# Altium PCB HX-SMJ-01.pcbdoc
Units mm, origin at the board's own origin, x right, y up, seen from the top; angles counter-clockwise.
Board outline 145.65 x 155.4 mm, 2 copper layers (Top Layer, Bottom Layer); 7 components, 10 nets, 43 pads, 0 vias.
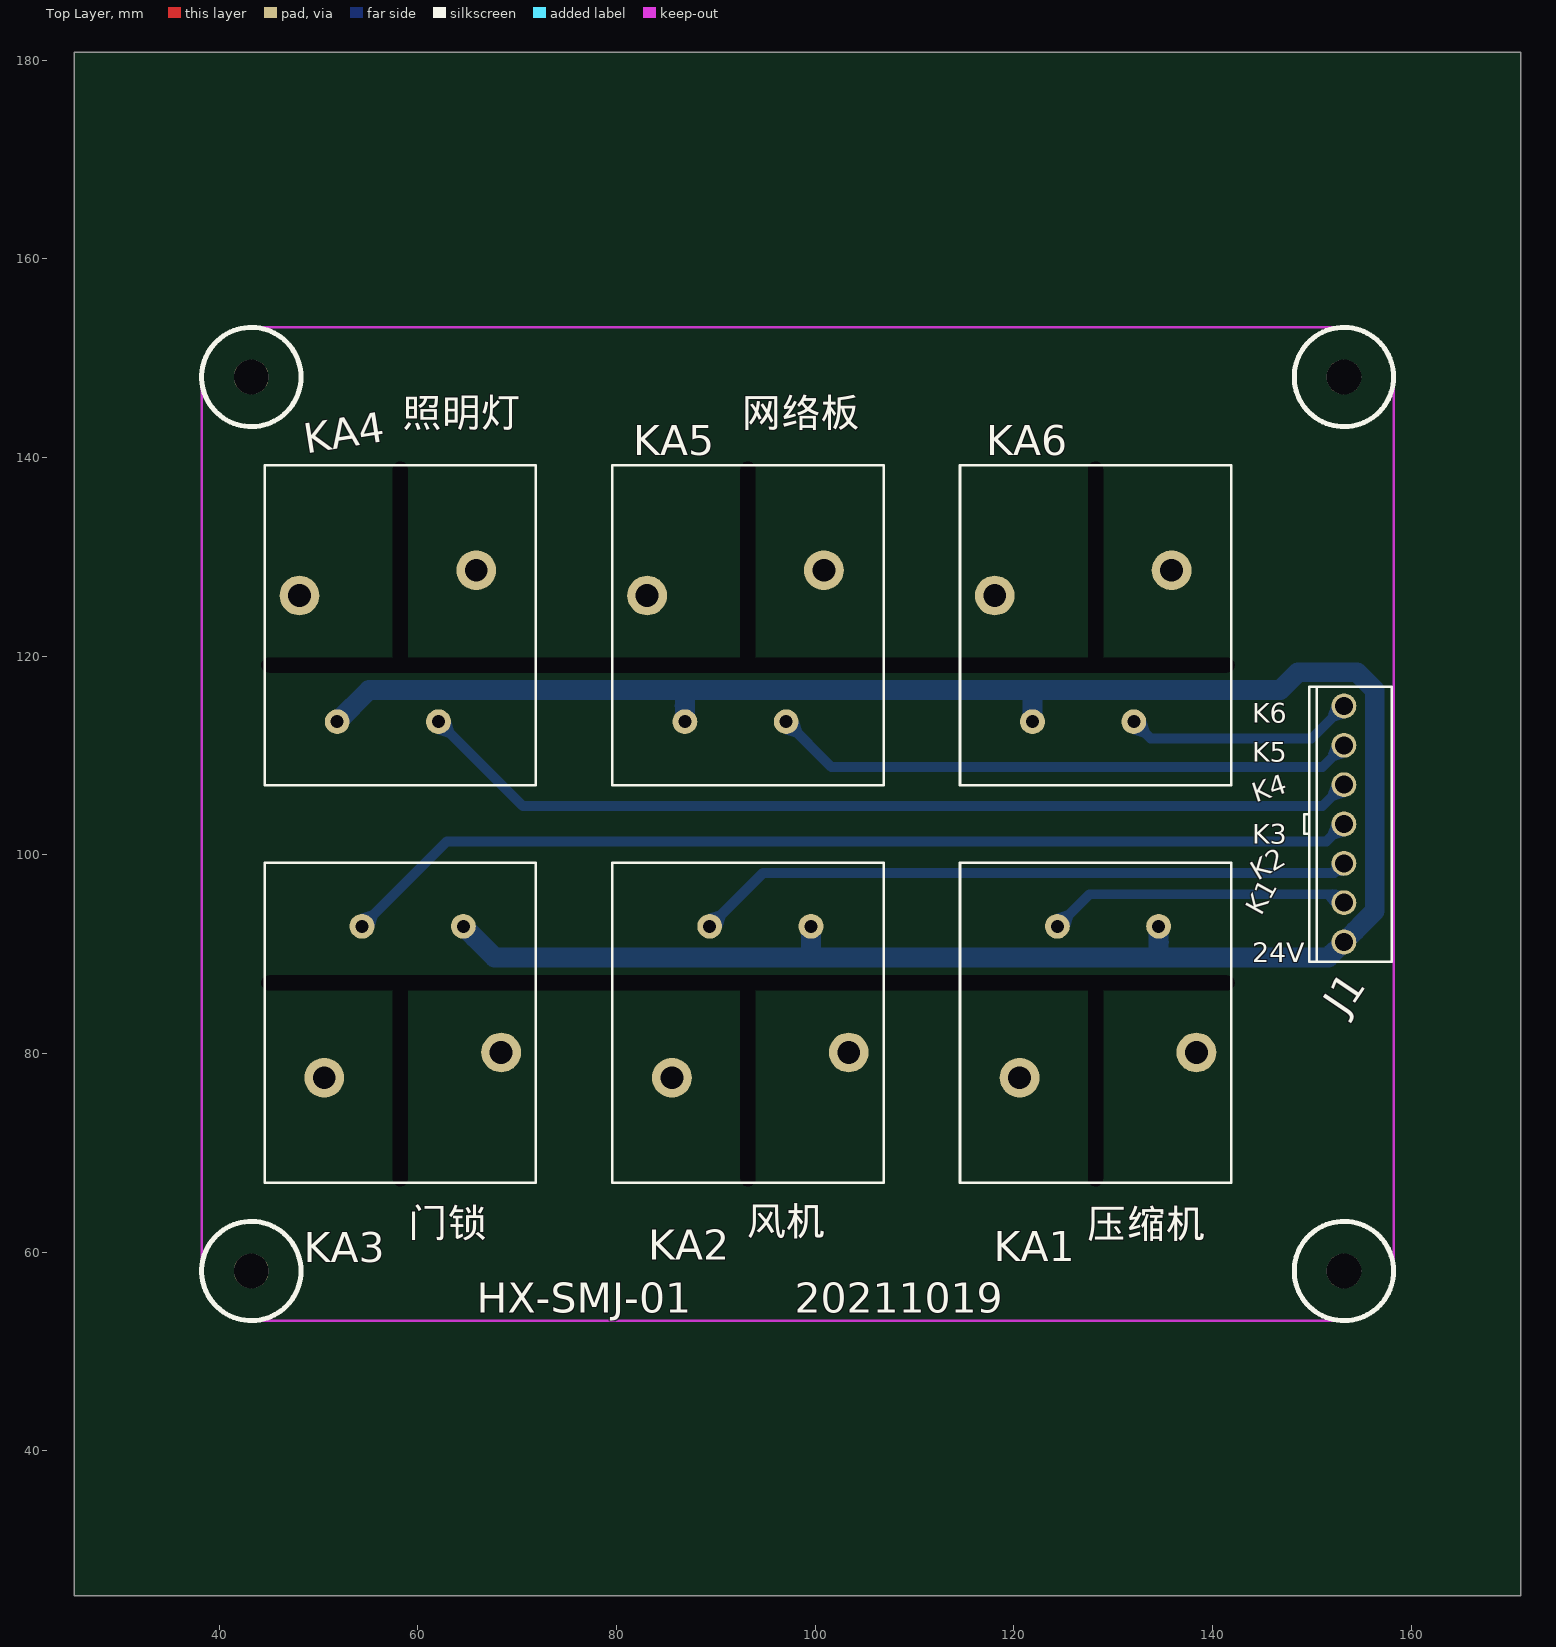
[diagram p0: Top Layer view]
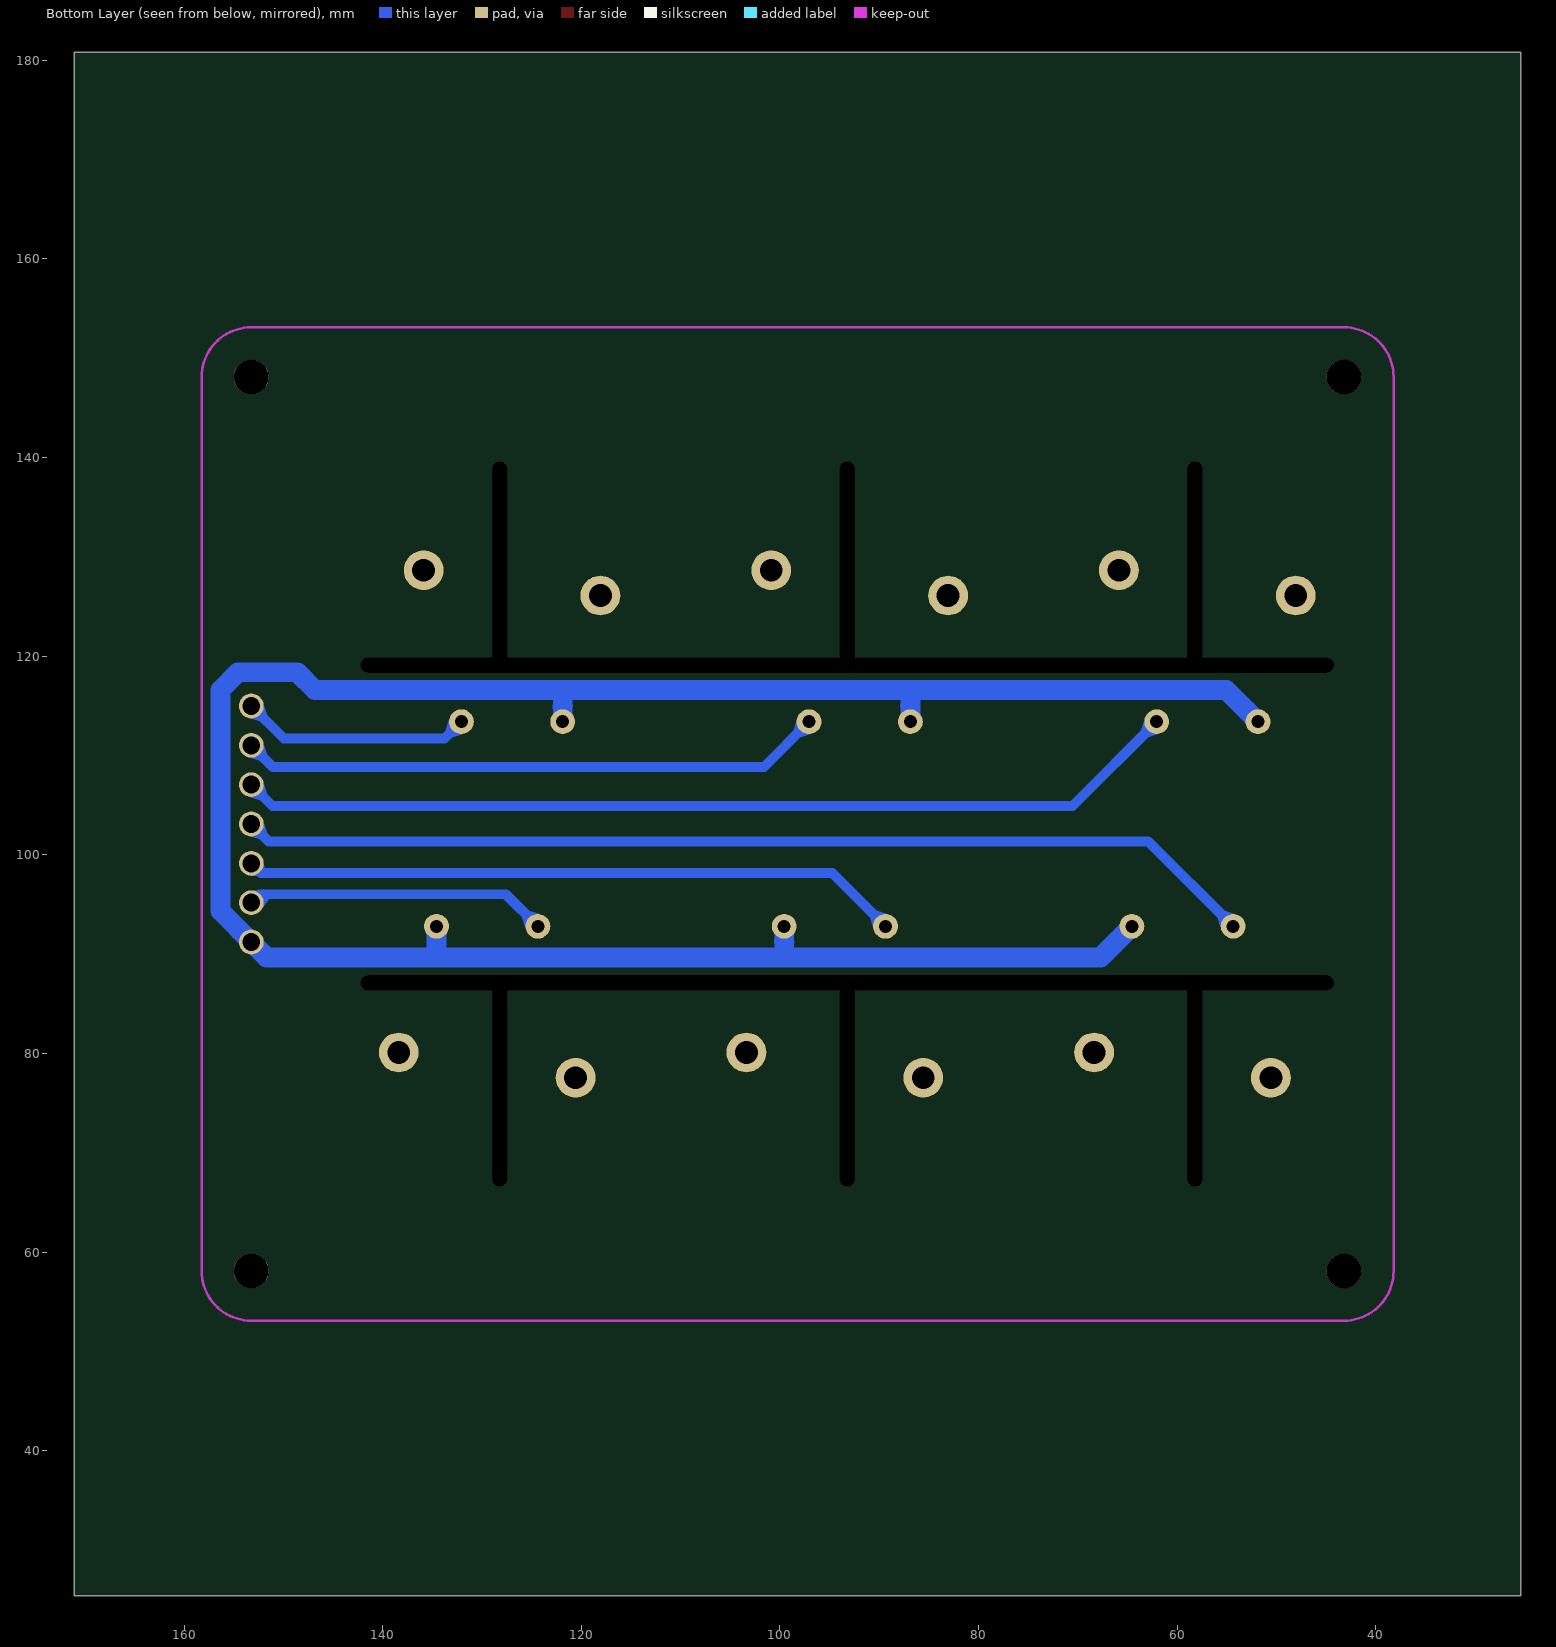
[diagram p1: Bottom Layer view, seen from below]

## Layer stack, top to bottom
Top Layer: signal copper (thickness not stored)
Dielectric: dielectric 0.32, FR-4, Dk 4.8
Bottom Layer: signal copper (thickness not stored)

## Board outline
171.054,25.4 25.4,25.4 25.4,180.8 171.054,180.8

## Components (designator, comment, footprint, x,y, rotation, side; value= is the part's Value field where it differs from the comment)
J1 "A3963WV-7P" CONN-TH_A3963WV-7P 153.227,103.1 r90 top
KA1 "RA2-105LM" RELAY-TH_RA2-105LM 128.227,83.1 r270 top
KA2 "RA2-105LM" RELAY-TH_RA2-105LM 93.227,83.1 r270 top
KA3 "RA2-105LM" RELAY-TH_RA2-105LM 58.227,83.1 r270 top
KA4 "RA2-105LM" RELAY-TH_RA2-105LM 58.227,123.1 r90 top
KA5 "RA2-105LM" RELAY-TH_RA2-105LM 93.227,123.1 r90 top
KA6 "RA2-105LM" RELAY-TH_RA2-105LM 128.227,123.1 r90 top

## Footprints (in the part's own frame and the unit in brackets; to place one, negate y for a bottom-side part, rotate by r counter-clockwise, add the part's x,y. Pads: shape width x height; smd on the part's side, far side on the other; paste and mask are expansions set on the pad)
CONN-TH_A3963WV-7P [mm]
  round 2.5 hole 1.8: 1(-11.88,0) 2(-7.92,0) 3(-3.96,0) 4(0,0) 5(3.96,0) 6(7.92,0) 7(11.88,0)
  silkscreen extent -13.88,-4.8 13.84,4
RELAY-TH_RA2-105LM [mm]
  round 2.5 hole 1.3: 1(-9.7,-3.85) 4(-9.7,6.35)
  round 4 hole 2.3: 2(5.54,-7.65) 3(3,10.15)
  silkscreen extent -16.1,-13.65 16.1,13.65

## Free pads (board coordinates)
  round 1 hole 1.5 slot 98 at 0 deg: 1(93.227,87.1) 1(93.227,119.1)
  round 1 hole 1.5 slot 21 at 90 deg: 2(58.227,77.1) 2(58.227,129.1) 2(93.227,77.1) 2(93.227,129.1) 2(128.227,129.1) 2(128.227,77.1)
  round 3.5 hole 3.5 unplated: ""(43.227,58.1) ""(43.227,148.1) ""(153.227,58.1) ""(153.227,148.1)

## Nets (pads, with @x,y where several pads share a name; then routed paths per layer and width w, separated by ;. In a path a pad name is that pad's centre, name@x,y a point inside that pad or via, vN(x,y) a via of type N, cw(c..) or ccw(c..) an arc to the next point about the centre after c; other vN are vias at no path point)
REALY_R1: J1.2 KA1.1 | length 30.5
  Bottom Layer w1: KA1.1 127.602,96.026 152.382,96.026 J1.2
REALY_R2: J1.3 KA2.1 | length 66.5
  Bottom Layer w1: KA2.1 94.762,98.185 152.273,98.185 J1.3
REALY_R3: J1.4 KA3.1 | length 103.1
  Bottom Layer w1: KA3.1 62.936,101.36 151.488,101.36 J1.4
REALY_R4: J1.5 KA4.1 | length 95.6
  Bottom Layer w1: KA4.1@62.078,113.399 70.561,104.916 151.084,104.916 J1.5@153.228,107.06
REALY_R5: J1.6 KA5.1 | length 58.9
  Bottom Layer w1: KA5.1@97.076,113.399 101.623,108.853 151.061,108.853 J1.6
REALY_R6: J1.7 KA6.1 | length 23.2
  Bottom Layer w1: KA6.1@132.077,113.399 133.777,111.7 149.949,111.7 J1.7@153.228,114.979
S$37: 
S$39: 
S$44: 
VDD_24V: J1.1 KA1.4 KA2.4 KA3.4 KA4.4 KA5.4 KA6.4 | length 237.2
  Bottom Layer w2: KA4.4@51.877,113.399 55.077,116.6 146.812,116.6 148.59,118.378 154.559,118.378 156.337,116.6 156.337,94.329 J1.1 151.684,89.676 67.701,89.676 KA3.4 ; KA5.4@86.877,113.4 86.877,116.6 ; 99.577,89.676 KA2.4 ; KA6.4 121.876,116.6 ; 134.577,89.676 KA1.4
pads on no net: KA1.2 KA1.3 KA2.2 KA2.3 KA3.2 KA3.3 KA4.2 KA4.3 KA5.2 KA5.3 KA6.2 KA6.3

## Keep-outs
Keep-Out Layer:
  lines w0.254: 38.227,58.1 ccw(c43.227,58.1) 43.227,53.1 ; 38.227,148.1 cw(c43.227,148.1) 43.227,153.1 ; 153.227,53.1 ccw(c153.227,58.1) 158.227,58.1 ; 153.227,153.1 cw(c153.227,148.1) 158.227,148.1

## Other copper
Bottom Layer:
  region net REALY_R6: 153.306,113.732 151.98,115.057 151.671,114.129 152.378,113.422
  region net REALY_R5: 153.306,109.772 151.98,111.097 151.671,110.169 152.378,109.462
  region net REALY_R4: 153.306,105.812 151.98,107.137 151.671,106.209 152.378,105.502
  region net REALY_R3: 153.306,101.852 151.98,103.178 151.671,102.249 152.378,101.543
  region net REALY_R2: 153.306,97.892 151.98,99.217 151.92,98.538 152.627,97.831
  region net REALY_R1: 152.976,96.404 152.044,94.777 151.464,95.526 152.037,96.526
  region net VDD_24V: 153.306,89.972 151.98,91.297 151.317,90.723 152.732,89.309
  region net VDD_24V: 154.475,91.141 153.149,92.467 153.724,93.13 155.138,91.716
  region net REALY_R6: 133.324,113.478 131.999,112.152 132.927,111.843 133.634,112.55
  region net VDD_24V: 122.814,114.227 120.939,114.227 120.876,115.102 122.876,115.102
  region net REALY_R5: 98.325,113.477 96.998,112.152 97.926,111.842 98.633,112.549
  region net VDD_24V: 87.814,114.227 85.939,114.227 85.877,115.102 87.877,115.102
  region net REALY_R4: 63.324,113.478 61.999,112.152 62.927,111.843 63.634,112.55
  region net VDD_24V: 53.124,113.322 51.798,114.647 52.373,115.31 53.787,113.896
  region net REALY_R3: 55.624,92.722 54.298,94.047 55.226,94.357 55.933,93.65
  region net VDD_24V: 65.824,92.878 64.499,91.552 65.073,90.889 66.487,92.304
  region net REALY_R2: 90.625,92.721 89.299,94.047 90.227,94.357 90.934,93.649
  region net VDD_24V: 100.515,91.973 98.64,91.973 98.577,91.098 100.577,91.098
  region net REALY_R1: 125.624,92.722 124.298,94.047 125.226,94.357 125.933,93.65
  region net VDD_24V: 135.514,91.973 133.639,91.973 133.577,91.098 135.577,91.098

## Silkscreen, mask and mechanical layers (free items; w line width, h text height)
Top Overlay:
  circle w0.5: c43.227,58.1 r5
  circle w0.5: c153.227,58.1 r5
  circle w0.5: c153.227,148.1 r5
  circle w0.5: c43.227,148.1 r5
  text "照明灯" at 58.42,142.127 h5
  text "网络板" at 92.583,142.127 h5
  text "K6" at 144.018,113.314 h2
  text "K5" at 144.018,109.377 h2
  text "K4" at 144.327,105.235 h2 r18
  text "K3" at 144.018,101.122 h2
  text "K2" at 144.533,97.328 h2 r31
  text "K1" at 144.893,93.763 h2 r61
  text "24V" at 144.018,89.184 h2
  text "风机" at 93.091,60.72 h5
  text "门锁" at 59.055,60.593 h5
  text "压缩机" at 127.381,60.466 h5
  text "HX-SMJ-01" at 65.913,53.886 h3
  text "20211019" at 97.917,53.886 h3
Document:
  lines w0.003: 98.202,103.074 98.252,103.125